# EAGLE board SOIC_TSSOP-20 (EAGLE 7.4.0)
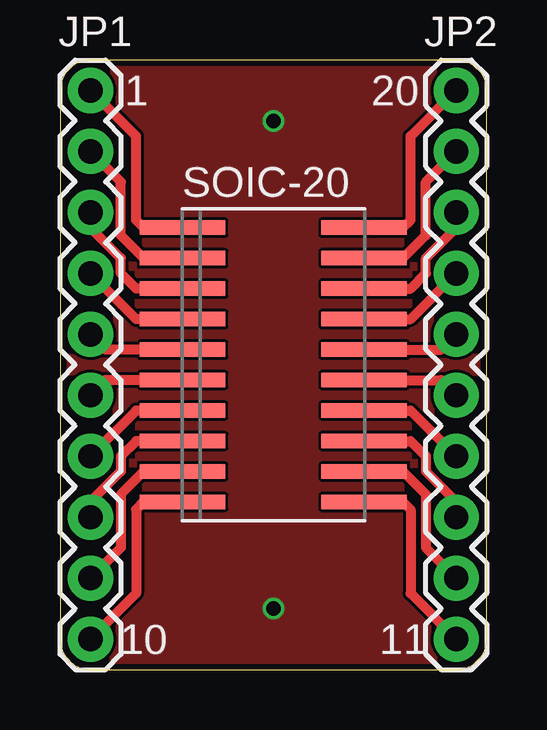
[diagram p0: board, top side]
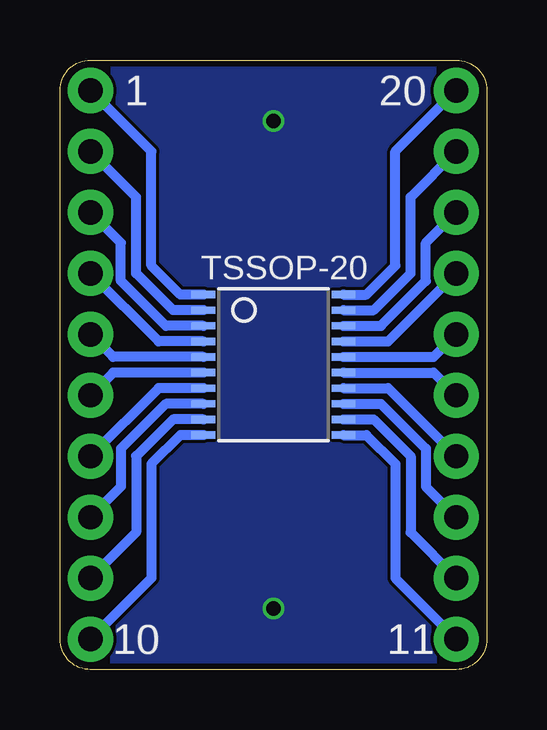
[diagram p1: board, bottom side, seen from below]

Size 17.78 x 25.4 mm. Coordinates in mm from the lower left corner, seen from the top.
Outline: 16.51,25.4 1.27,25.4 arc90 0,24.13 0,1.27 arc90 1.27,0 16.51,0 arc90 17.78,1.27 17.78,24.13 arc90 16.51,25.4
Copper layers (1*16): Top 0.035mm / dielectric 1.5mm / Bottom 0.035mm
Design rules "dirt_cheap_dirty_boards.v1": minimum track width 5mil, minimum drill 12mil, track to track 5mil, track to pad 5mil, pad to pad 5mil, via to via 5mil, smd to smd 0mil, copper to edge 10mil, drill to drill 10mil, minimum pad ring 10mil, minimum via ring 6mil, stop-mask expansion 2mil, vias tented up to drill 25mil, thermal gap 10mil

## Footprints (pad centres in the part's own frame; a part is rotated, then mirrored left to right if it is on the bottom)
1X10 = drill 1.016 pad 1.88: 1 0,0; 2 2.54,0; 3 5.08,0; 4 7.62,0; 5 10.16,0; 6 12.7,0; 7 15.24,0; 8 17.78,0; 9 20.32,0; 10 22.86,0
SOIC-20NW = smd 0.6 x 3.56: P1 -5.715,-3.78; P2 -4.445,-3.78; P3 -3.175,-3.78; P4 -1.905,-3.78; P5 -0.635,-3.78; P6 0.635,-3.78; P7 1.905,-3.78; P8 3.175,-3.78; P9 4.445,-3.78; P10 5.715,-3.78; P11 5.715,3.78; P12 4.445,3.78; P13 3.175,3.78; P14 1.905,3.78; P15 0.635,3.78; P16 -0.635,3.78; P17 -1.905,3.78; P18 -3.175,3.78; P19 -4.445,3.78; P20 -5.715,3.78
TSSOP20 = smd 0.305 x 0.991: 1 -2.925,-2.918; 2 -2.275,-2.918; 3 -1.625,-2.918; 4 -0.975,-2.918; 5 -0.325,-2.918; 6 0.325,-2.918; 7 0.975,-2.918; 8 1.625,-2.918; 9 2.275,-2.918; 10 2.925,-2.918; 11 2.925,2.918; 12 2.275,2.918; 13 1.625,2.918; 14 0.975,2.918; 15 0.325,2.918; 16 -0.325,2.918; 17 -0.975,2.918; 18 -1.625,2.918; 19 -2.275,2.918; 20 -2.925,2.918

## Placement (x,y rotation side)
JP1  [1X10]  1.27,1.27 90 top
JP2  [1X10]  16.51,1.27 90 top
SOIC-20  [SOIC-20NW]  8.89,12.7 270 top
TSSOP-20  [TSSOP20]  8.89,12.7 270 bottom

## Library data of the parts
JP1 JP2 = SparkFun-Connectors; PROD_ID: CONN-11563
SOIC-20 = dp_devices
TSSOP-20 = Kevin-GenericICFootprints

## Nets
1: JP1.10 SOIC-20.P1 TSSOP-20.20
2: JP1.9 SOIC-20.P2 TSSOP-20.19
3: JP1.8 SOIC-20.P3 TSSOP-20.18
4: JP1.7 SOIC-20.P4 TSSOP-20.17
5: JP1.6 SOIC-20.P5 TSSOP-20.16
6: JP1.5 SOIC-20.P6 TSSOP-20.15
7: JP1.4 SOIC-20.P7 TSSOP-20.14
8: JP1.3 SOIC-20.P8 TSSOP-20.13
9: JP1.2 SOIC-20.P9 TSSOP-20.12
10: JP1.1 SOIC-20.P10 TSSOP-20.11
11: JP2.1 SOIC-20.P11 TSSOP-20.10
12: JP2.2 SOIC-20.P12 TSSOP-20.9
13: JP2.3 SOIC-20.P13 TSSOP-20.8
14: JP2.4 SOIC-20.P14 TSSOP-20.7
15: JP2.5 SOIC-20.P15 TSSOP-20.6
16: JP2.6 SOIC-20.P16 TSSOP-20.5
17: JP2.7 SOIC-20.P17 TSSOP-20.4
18: JP2.8 SOIC-20.P18 TSSOP-20.3
19: JP2.9 SOIC-20.P19 TSSOP-20.2
20: JP2.10 SOIC-20.P20 TSSOP-20.1

## Tracks (layer width: path | path; a pad name or v marks a point on that pad's centre or on a via)
1
  Top 0.406: JP1.10 3.17,22.23 3.17,18.73 3.49,18.41 SOIC-20.P1
  Bottom 0.406: TSSOP-20.20 5.01,15.62 3.81,16.83 3.81,21.59 JP1.10
2
  Top 0.406: SOIC-20.P2 3.49,17.14 2.54,18.1 2.54,20.32 JP1.9
  Bottom 0.406: TSSOP-20.19 4.71,14.97 3.17,16.51 3.17,19.68 JP1.9
3
  Top 0.406: SOIC-20.P3 3.17,15.88 2.54,16.51 2.54,17.14 1.27,18.41 JP1.8
  Bottom 0.406: JP1.8 2.54,17.78 2.54,16.19 4.41,14.32 TSSOP-20.18
4
  Top 0.406: SOIC-20.P4 3.17,14.61 JP1.7
  Bottom 0.406: TSSOP-20.17 4.11,13.68 JP1.7
5
  Top 0.406: SOIC-20.P5 1.91,13.34 JP1.6
  Bottom 0.406: TSSOP-20.16 2.21,13.03 JP1.6
6
  Top 0.406: SOIC-20.P6 1.91,12.06 JP1.5
  Bottom 0.406: TSSOP-20.15 2.21,12.38 JP1.5
7
  Top 0.406: SOIC-20.P7 3.17,10.79 JP1.4
  Bottom 0.406: TSSOP-20.14 4.11,11.72 JP1.4
8
  Top 0.406: SOIC-20.P8 3.17,9.53 2.54,8.89 2.54,8.26 1.27,6.99 JP1.3
  Bottom 0.406: TSSOP-20.13 4.41,11.07 2.54,9.21 2.54,7.62 JP1.3
9
  Top 0.406: SOIC-20.P9 3.49,8.26 2.54,7.3 2.54,5.08 JP1.2
  Bottom 0.406: TSSOP-20.12 4.71,10.43 3.17,8.89 3.17,5.71 JP1.2
10
  Top 0.406: SOIC-20.P10 3.49,6.99 3.17,6.67 3.17,3.17 JP1.1
  Bottom 0.406: TSSOP-20.11 5.01,9.78 3.81,8.57 3.81,3.81 JP1.1
11
  Top 0.406: SOIC-20.P11 14.29,6.99 14.61,6.67 14.61,3.17 JP2.1
  Bottom 0.406: TSSOP-20.10 12.77,9.78 13.97,8.57 13.97,3.81 JP2.1
12
  Top 0.406: SOIC-20.P12 14.29,8.26 15.24,7.3 15.24,5.08 JP2.2
  Bottom 0.406: TSSOP-20.9 13.07,10.43 14.61,8.89 14.61,5.71 JP2.2
13
  Top 0.406: SOIC-20.P13 14.61,9.53 15.24,8.89 15.24,8.26 16.51,6.99 JP2.3
  Bottom 0.406: TSSOP-20.8 13.37,11.07 15.24,9.21 15.24,7.62 JP2.3
14
  Top 0.406: SOIC-20.P14 14.61,10.79 JP2.4
  Bottom 0.406: TSSOP-20.7 13.68,11.72 JP2.4
15
  Top 0.406: SOIC-20.P15 15.88,12.06 JP2.5
  Bottom 0.406: TSSOP-20.6 15.56,12.38 JP2.5
16
  Top 0.406: SOIC-20.P16 15.88,13.34 JP2.6
  Bottom 0.406: TSSOP-20.5 15.56,13.03 JP2.6
17
  Top 0.406: SOIC-20.P17 14.61,14.61 JP2.7
  Bottom 0.406: TSSOP-20.4 13.68,13.68 JP2.7
18
  Top 0.406: SOIC-20.P18 14.61,15.88 15.24,16.51 15.24,17.14 16.51,18.41 JP2.8
  Bottom 0.406: TSSOP-20.3 13.37,14.32 15.24,16.19 15.24,17.78 JP2.8
19
  Top 0.406: SOIC-20.P19 14.29,17.14 15.24,18.1 15.24,20.32 JP2.9
  Bottom 0.406: TSSOP-20.2 13.07,14.97 14.61,16.51 14.61,19.68 JP2.9
20
  Top 0.406: SOIC-20.P20 14.29,18.41 14.61,18.73 14.61,22.23 JP2.10
  Bottom 0.406: TSSOP-20.1 12.77,15.62 13.97,16.83 13.97,21.59 JP2.10
GND  (via drill 0.6)
  other vias: 8.89,22.86 8.89,2.54
  pour Top: 0,25.4 17.78,25.4 17.78,0 0,0
  pour Bottom: 0,25.4 17.78,25.4 17.78,0 0,0

## Text on the board
tNames: 1 | 20 | 10 | 11
bNames: 20 | 1 | 11 | 10